# Allegro board WAVE_GENERATOR.brd
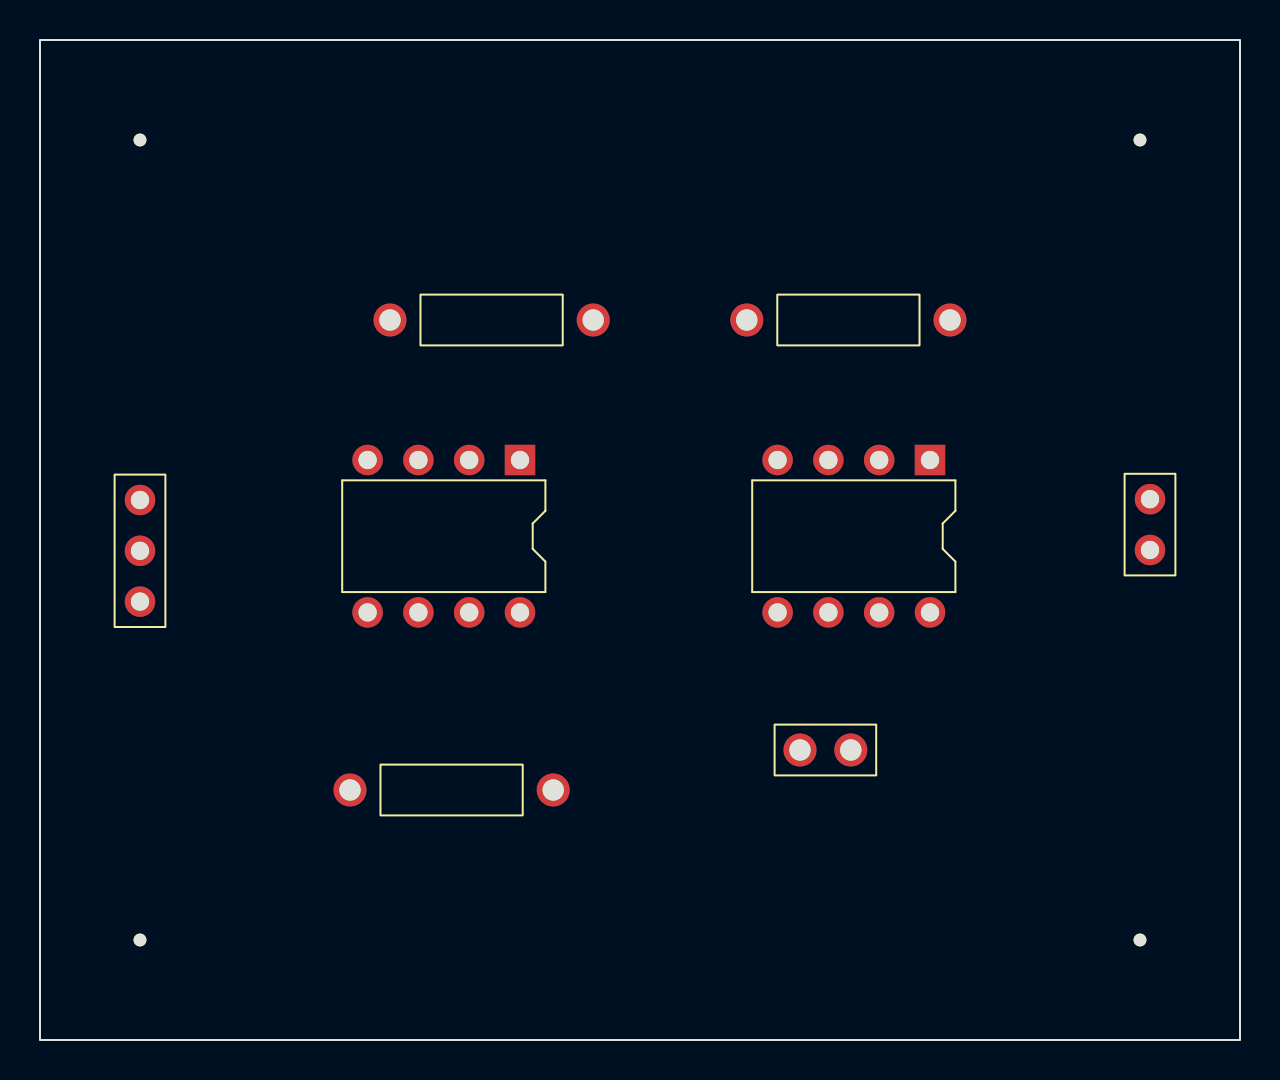
[diagram p0: board, top side]
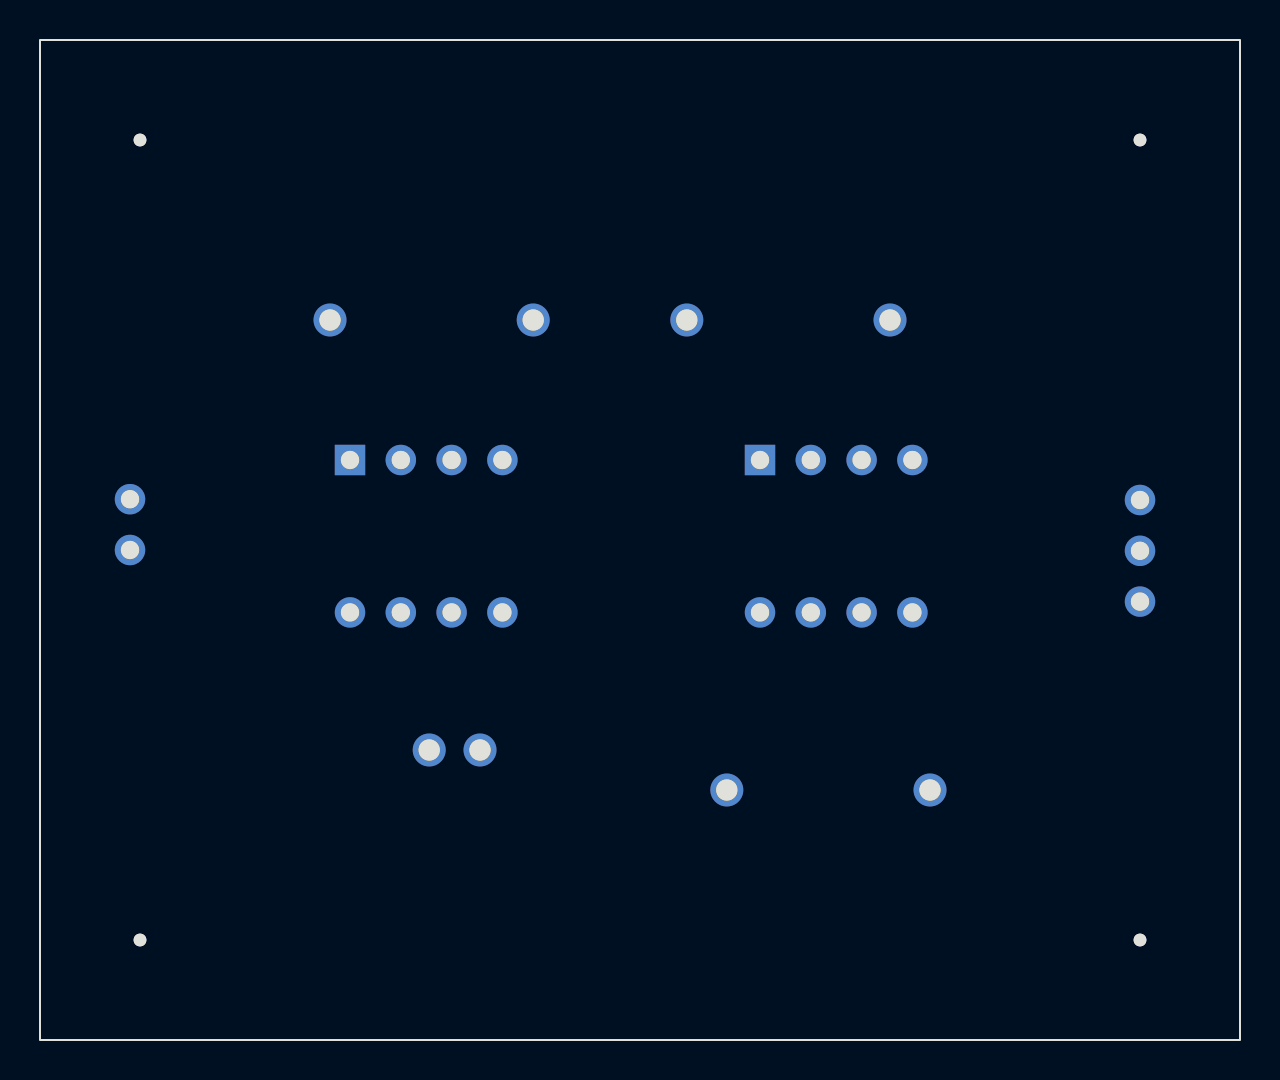
[diagram p1: board, bottom side, seen from below]

Outline 60 x 50 mm; copper layers: TOP, BOTTOM. Coordinates in mm from the lower left corner of the outline.
Outline path: rectangle 0,0 60,50

## Placement (name value [footprint] x y rotation side)
C1  0.01uF  [CAPCK05]  38 14.5 270 top
J1  CON2  [JUMPER2]  55.5 24.5 90 top
J2  CON3  [JUMPER3]  5 27 270 top
NOREF  -  [unnamed]  55 45 0 top
NOREF#2  -  [unnamed]  55 5 0 top
NOREF#3  -  [unnamed]  5 45 0 top
NOREF#4  -  [unnamed]  5 5 0 top
R1  2.7K  [RES400]  17.5 36 270 top
R2  20K  [RES400]  45.5 36 90 top
R3  10K  [RES400]  15.5 12.5 270 top
U1  LF356  [DIP8_3]  24 29 270 top
U2  LF356  [DIP8_3]  44.5 29 270 top

## Library data of the parts
C1 = CAP NP: Tolerance: ***; User Part Number: ***
J1 = CONN TRBLK 2: User Part Number: ***
J2 = CONN TRBLK 3: User Part Number: ***
R1-R3 = RESISTOR: Tolerance: ***; User Part Number: ***
U1 = LF356_3: Tolerance: ***; User Part Number: ***
U2 = LF356_2: Tolerance: ***; User Part Number: ***

## Footprints (pads in the part's own frame, mm; a bottom-side part is the same pattern mirrored in y, then rotated)
CAPCK05
  round 1.651 hole 1.067: 1(0,0) 2(0,2.54)
DIP8_3
  rect 1.524x1.524 hole 0.914: 1(0,0)
  round 1.524 hole 0.914: 2(0,-2.54) 3(0,-5.08) 4(0,-7.62) 5(7.62,-7.62) 6(7.62,-5.08) 7(7.62,-2.54) 8(7.62,0)
JUMPER2
  round 1.524 hole 0.914: 1(0,0) 2(2.54,0)
JUMPER3
  round 1.524 hole 0.914: 1(0,0) 2(2.54,0) 3(5.08,0)
RES400
  round 1.651 hole 1.067: 1(0,0) 2(0,10.16)
unnamed
  round 0.635 hole 3.175 unplated: (0,0)

## Nets
+12V: J2.1 U1.4(V-) U2.4(V-)
-12V: J2.3 U1.7(V+) U2.7(V+)
GND: J1.2 J2.2 U1.2(-IN) U2.3(+IN)
N02460: R1.1 R2.1 U1.6(OUT)
N02480: C1.2 R1.2 U2.2(-IN)
N02516: C1.1 J1.1 R3.2 U2.6(OUT)
N02560: R2.2 R3.1 U1.3(+IN)

Pads without a net: U1 1 5 8; U2 1 5 8
